# Altium PCB FMCWRadar.PcbDoc (part 3 of 5)
Units mil, origin at the board's own origin, x right, y up, seen from the top; angles counter-clockwise.
Board outline 4763.78 x 3464.57 mil, 6 copper layers (L1, L2(GND), L3, L4, L5(GND), L6), stack 32.112 mil thick; 306 components, 195 nets, 1057 pads, 1126 vias.
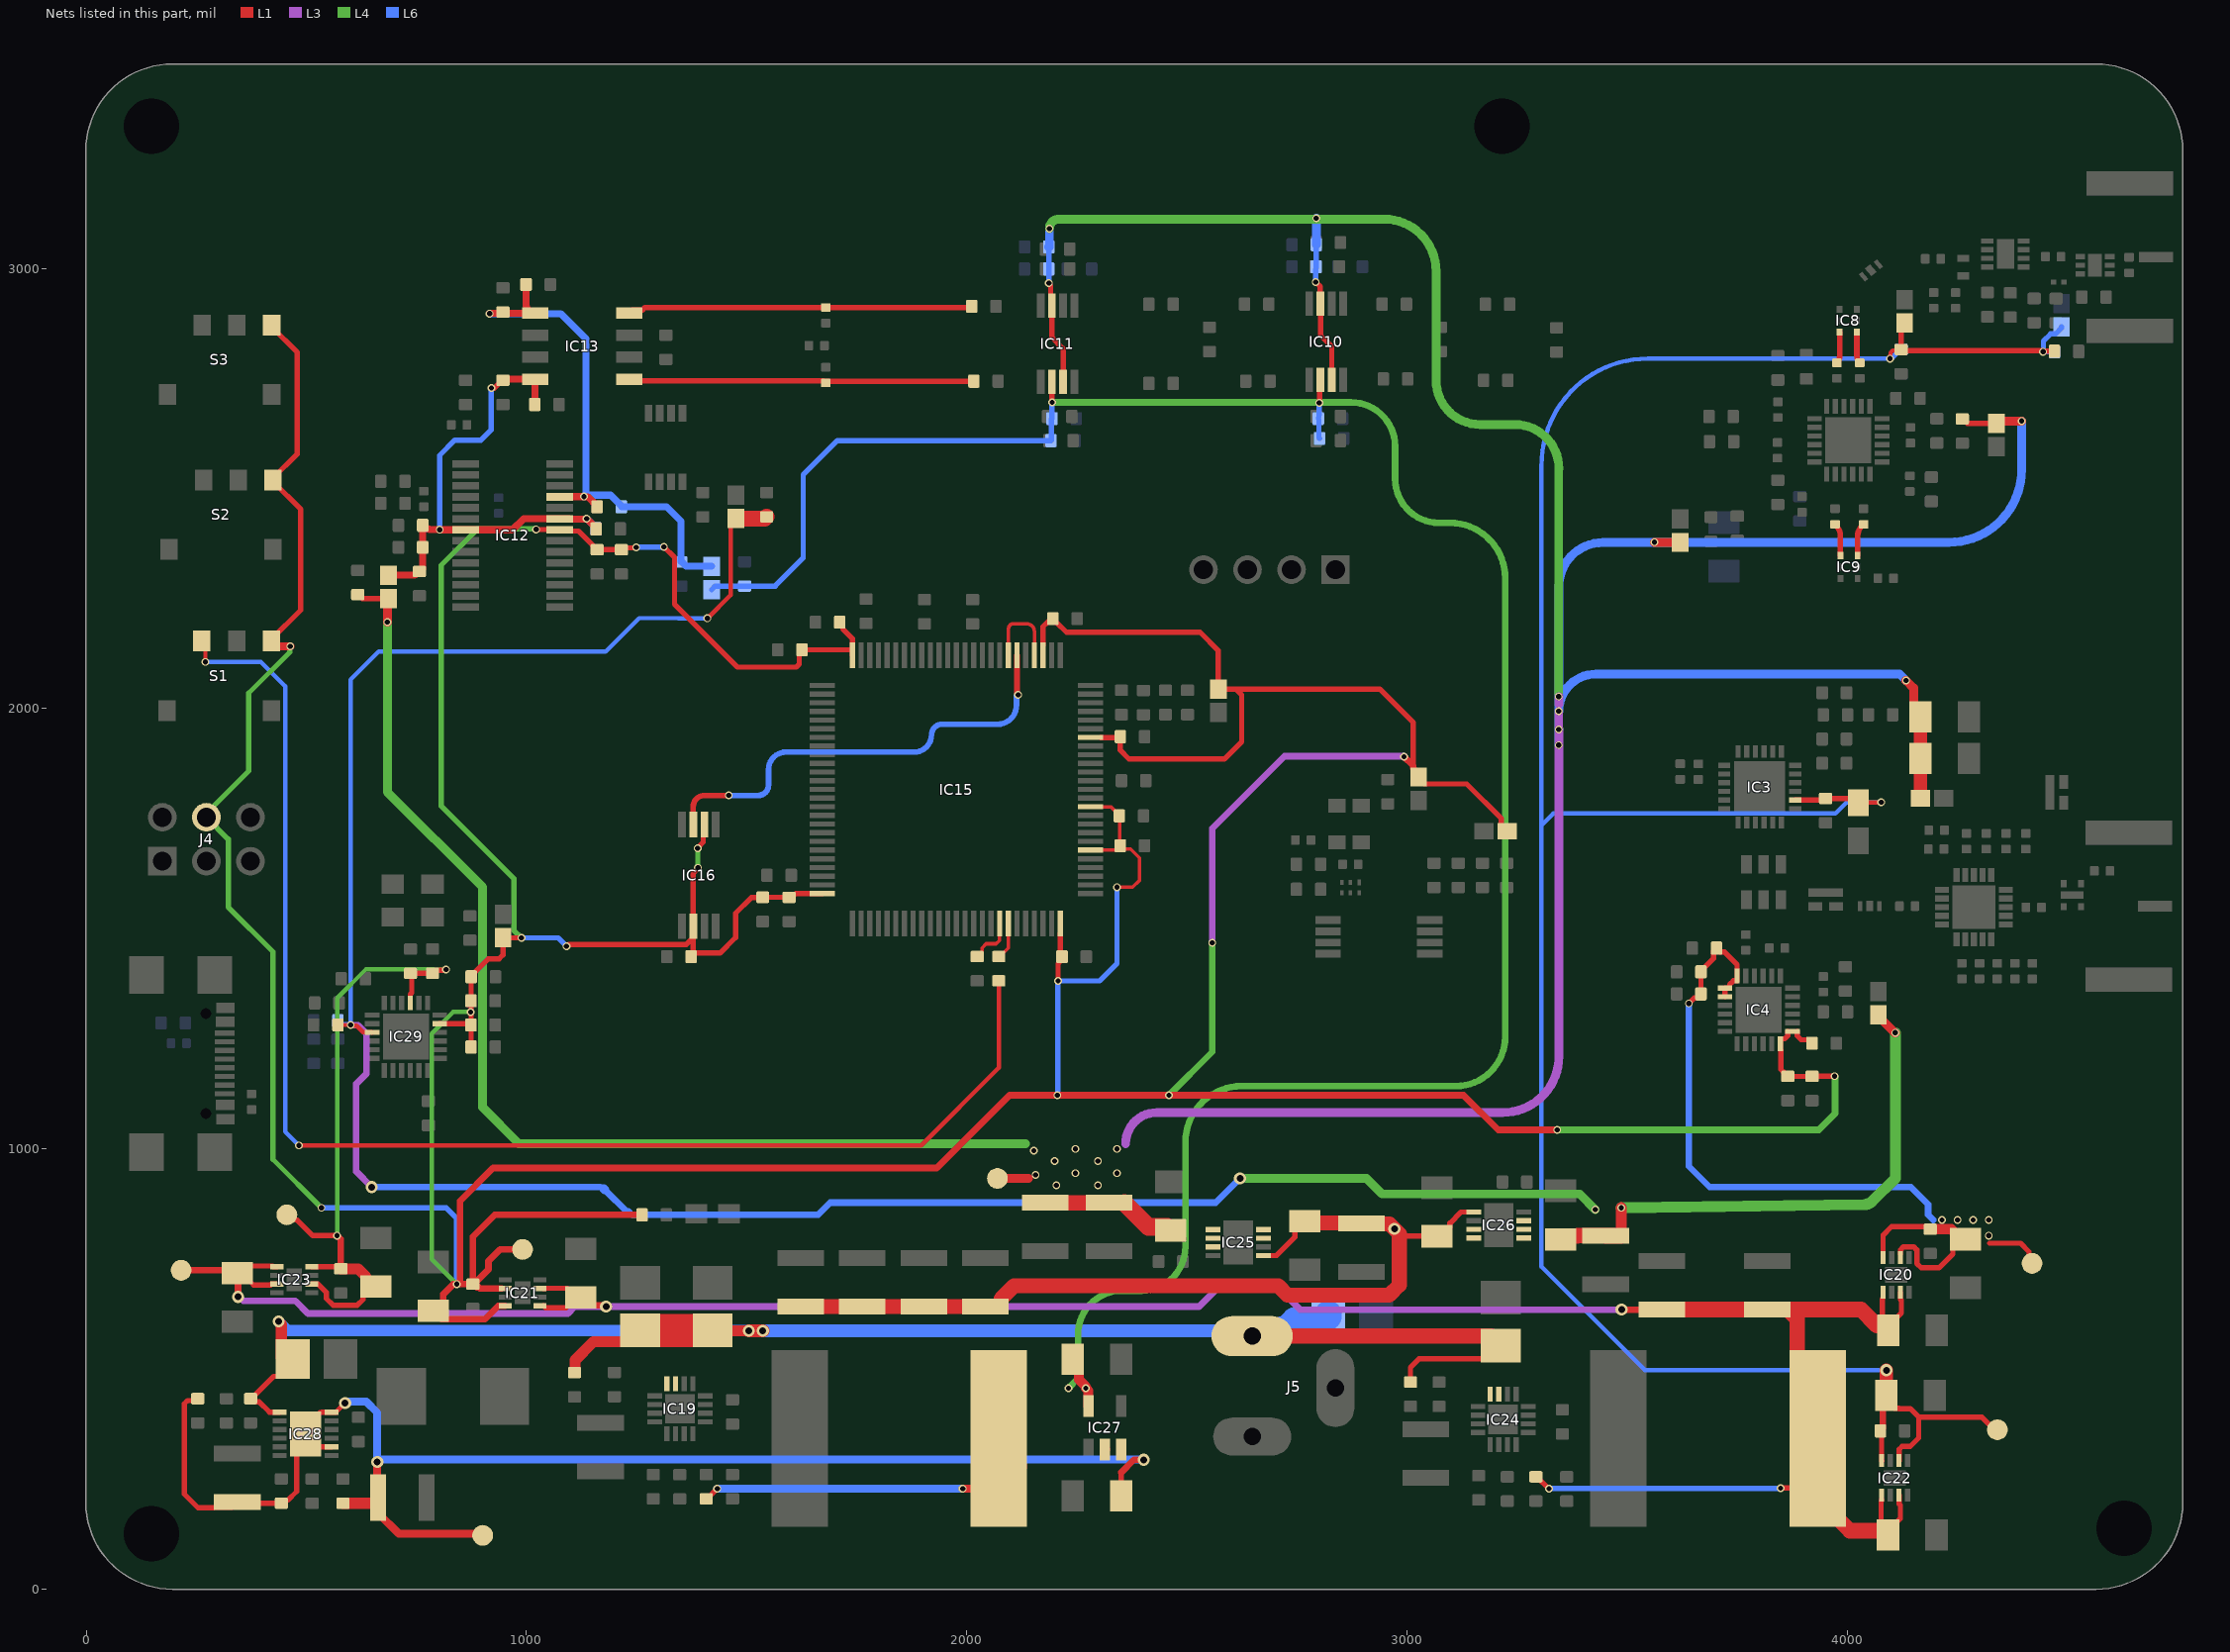
[diagram p6: the nets of this part, all layers, seen from the top]

## Via types
v1: diameter 17.72, hole 11.81, L1 to L6, tented both sides, 692 vias
v2: diameter 15.75, hole 11.81, L1 to L6, tented both sides, 386 vias
v3: diameter 27.56, hole 15.75, L1 to L6, tented both sides, 44 vias
v4: diameter 27.56, hole 11.81, L1 to L6, tented both sides, 3 vias
v5: diameter 23.62, hole 13.78, L1 to L6, tented both sides, 1 vias

## Nets (pads, with @x,y where several pads share a name; then routed paths per layer and width w, separated by ;. In a path a pad name is that pad's centre, name@x,y a point inside that pad or via, vN(x,y) a via of type N, cw(c..) or ccw(c..) an arc to the next point about the centre after c; other vN are vias at no path point) (continued)
+5V8: (continued)
  L1 w12: R42.2@1408.29,204.59 1410.25,204.59 v1(1433.48,227.82) ; L3.2@2015.31,227.82 2073.29,285.8 2073.29,302.98 L3.2@2073.29,342.15 ; IC25.5@2674.24,757.35 2703.91,757.35 2745.6,799.03 2745.6,823.03 C154.2@2748.04,825.47 ; 2979.62,802.02 3073.39,802.02 C161.2@3074.1,801.32 ; C161.2@3078.14,801.32 3097.73,820.91 3097.73,830.75 3123.32,856.34 IC26.5@3151.76,856.34
  L1 w18: v1(1991.16,227.82) L3.2@2015.31,227.82
  L1 w25: C132.2@1762.82,637.63 C132.2@1762.82,641.21 ; L3.2@2073.29,342.15 L3.2@2119,387.86
  L1 w34: C129.2@1622.82,641.21 C132.2@1762.82,641.21 C130.2@1902.82,641.21 2077.82,641.21 2078.82,642.21 2078.82,659.51 2107.76,688.45 2707.92,688.45 2728.9,667.47 2960.04,667.47 2983.04,690.47 2983.04,806.47 v3(2971.74,817.77) 2960.45,829.06 2897.68,829.06 C153.2@2896.68,830.06 2895.68,831.06 2779.68,831.06 C154.2@2775.04,835.71
  L1 w80: L3.2@2073.29,302.98 L3.2@2097.27,279
  L6 w18: v1(1433.48,227.82) v1(1991.16,227.82)
+5VA: C2.2 C3.2 C72.1 C73.1 C74.2 C75.2 C97.2 C155.2 C156.2 C157.2 FB1.1 FB5.1 FB6.2 FB8.1 IC10.3 IC10.7 IC11.3 IC11.7 IC25.1 IC25.2 IC25.3 pad.18 R14.2 | length 10733.6
  L1 w12: C97.2@616.76,2258.53 618.72,2258.53 627.77,2249.47 FB8.1@686.76,2249.47 ; v1(2186.76,2966.47) 2186.76,2964.93 2190.98,2960.7 2190.98,2918 IC11.3@2193.84,2915.14 2193.84,2842.75 2219.43,2817.16 IC11.7@2219.43,2741.91 ; C155.2@2463.61,814.43 C155.2@2465.57,816.4 ; C155.2@2491.16,796.72 C155.2@2493.04,794.84 ; v1(2793.04,2968.47) 2803.28,2958.23 2803.28,2921.24 IC10.3@2804.11,2920.41 ; IC10.3@2803.84,2920.14 2803.84,2847.75 2829.43,2822.16 IC10.7@2829.43,2746.91 ; R14.2@4262.04,2657.59 4264,2657.59 4273.56,2648.04 FB5.1@4339.32,2648.04
  L1 w20: v1(684.08,2196.32) 684.08,2246.79 FB8.1@686.76,2249.47 ; pad.18@2069.9,932.54 2140.77,932.54 ; v1(3562.36,2377.76) 3562.7,2377.43 FB6.2@3621.09,2377.43 ; v1(4134.06,2063.67) 4151.21,2046.52 4151.21,1996.27 C2.2@4166.36,1981.12 ; FB5.1@4339.32,2648.04 cw(c4344.3,2648.04) 4344.3,2653.02 v1(4396.68,2653.02)
  L1 w30: FB1.1@4166.76,1796.09 C3.2@4166.76,1886.09 C2.2@4166.76,1981.09
  L1 w35: C157.2@2178.29,877.15 C156.2@2323.29,877.15 C156.2@2358.29,877.15 ; C155.2@2455.51,822.52 C155.2@2463.61,814.43
  L1 w40: C156.2@2358.29,877.15 2412.92,822.52 C155.2@2455.51,822.52
  L3 w20: 2361.24,1011.28 cw(c2432.11,1011.28) 2432.11,1082.15 3217.94,1082.15 ccw(c3217.94,1209.71) 3345.5,1209.71 3345.5,1916.17 v1(3344.87,1916.8) ; v1(3344.87,1952.31) 3345.5,1951.68 v1@3345.5,1916.8 ; v1(3344.87,1993.96) 3344.87,1953.51 v1@3345.5,1952.88 ; v1(3344.87,2027.03) 3345.5,2026.4 3345.5,2010.5
  L4 w20: v1(684.08,2196.32) 684.08,1810.5 900.61,1593.96 900.61,1093.96 983.29,1011.28 2133.5,1011.28 ; v1(2188.01,3090.02) cw(c2209.83,3090.02) 2209.83,3111.84 2948.09,3111.84 cw(c2948.09,2993.4) 3066.53,2993.4 3066.53,2780.43 3066.53,2780.34 3066.53,2745.14 ccw(c3166.53,2745.14) 3166.53,2645.14 3245.5,2645.14 cw(c3245.5,2545.14) 3345.5,2545.14 3344.87,2544.51 v1(3344.87,2027.03)
  L6 w12: C73.1@2186.64,3048.53 2186.76,3048.53 C74.2@2186.76,2998.53 v1(2186.76,2966.47) v1@2187.04,2966.47 ; v1(2793.04,2968.47) 2793.04,2994.57 C75.2@2794.2,3003.53 C72.1@2794.2,3053.53
  L6 w20: C73.1@2186.64,3048.53 ccw(c2186.64,3049.91) 2186.75,3048.53 ccw(c2186.64,3049.91) 2188.01,3049.91 v1(2188.01,3090.02) ; C72.1@2794.2,3053.53 2794.31,3053.53 v1(2794.31,3113.65) ; v1(3344.87,1916.8) v1(3344.87,1952.31) ; v1(3344.87,1993.96) 3344.87,1953.51 v1@3345.5,1952.88 ; v1(3344.87,2027.03) 3344.87,1994.59 3345.5,1993.96 cw(c3429.75,1993.96) 3429.75,2078.21 4119.52,2078.21 v1(4134.06,2063.67) ; v1@3345.5,2027.03 3345.5,2277.09 cw(c3445.5,2277.09) 3445.5,2377.09 v1@3562.03,2377.09 ; v1@3562.03,2377.43 4231.32,2377.43 ccw(c4231.32,2542.78) 4396.68,2542.78 v1(4396.68,2653.02)
  other v1: 2203.76,916.8 2298.25,916.8 2156.52,940.42 2247.07,944.35 2341.56,944.35 2199.83,971.91 2298.25,971.91 2152.58,995.54 2247.07,999.47 2341.56,999.47
+5VA_ADC: C80.2 C81.2 C82.2 C83.2 C86.2 C87.2 C98.2 FB8.2 IC12.7 IC12.23 IC13.8 | length 1205.4
  L1 w12: v1(920.3,2727.82) 926.97,2727.82 944.79,2745.65 C86.2@946.75,2745.65 cw(c949.2,2745.65) C86.2@949.2,2748.09 ; IC13.8@1019.04,2747.14 cw(c1019.98,2747.14) IC13.8@1019.98,2748.09
  L1 w16: FB8.2@686.76,2302.7 746.29,2302.7 754.79,2311.21 C98.2@756.76,2311.21 758.72,2311.21 763.72,2316.21 763.72,2318.17 764.31,2318.76 C80.2@764.31,2366.09 C82.2@764.31,2416.09 764.31,2414.13 769.31,2409.13 776.25,2409.13 778.92,2406.45 802.67,2406.45 803.13,2406 IC12.7@860.5,2406 ; IC12.7@862.02,2405.87 968.42,2405.87 993.38,2430.83 IC12.23@1075.56,2430.83 ; C86.2@949.2,2748.09 IC13.8@1019.98,2748.09 ; C87.2@1019.04,2690.47 IC13.8@1019.04,2747.14 ; IC12.23@1075.3,2431.09 1096.77,2431.09 1097.34,2430.52 1103.15,2430.52 1103.65,2430.02 1138.22,2430.02 1158.2,2410.05 C83.2@1158.2,2408.09
  L6 w12: v1(803,2406.13) 803,2575.09 837.62,2609.71 896.68,2609.71 920.3,2633.33 v1(920.3,2727.82)
  L6 w16: v1(1136.77,2431.47) 1158.2,2410.05 C81.2@1158.2,2408.09
+5VD: C90.2 C162.2 C163.2 C178.2 C179.2 FB2.2 FB7.2 IC26.1 IC26.2 IC26.3 IC29.3 | length 6641.3
  L1 w10: C179.2@571.87,1281.09 v1(600.75,1281.1) ; v1(600.75,1281.1) 602.22,1279.63 614.04,1279.63 628.6,1265.06 648.61,1265.06 IC29.3@649.51,1264.16 ; v1(1411.03,2204.87) 1463.61,2257.44 1463.61,2419.32 FB7.2@1475.76,2431.47
  L1 w20: FB2.2@4071.19,1304.07 4071.19,1301.16 4108.82,1263.54 v1(4109.65,1263.54)
  L1 w25: C163.2@3487.23,802.67 v1(3487.23,865.61)
  L1 w35.43: FB7.2@1475.76,2431.47 1541.7,2431.47 C90.2@1545.76,2435.53 ; C162.2@3349.59,794.02 3357.46,801.89 3386.97,801.89 3388.06,802.98 3463.57,802.98 C163.2@3463.61,803.02 ; C163.2@3451.79,802.39 C163.2@3486.79,802.39
  L3 w15: v1(600.75,1281.1) 601.63,1280.22 617.7,1280.22 636.83,1261.09 636.83,1171.15 613.21,1147.53 613.21,948.29 v3(648.64,912.86)
  L4 w20: v3(2621.09,932.54) 2908.49,932.54 2943.92,897.11 3392.74,897.11 v1(3428.17,861.68)
  L4 w25: v1(3487.23,865.61) 4040.14,873.35 ccw(c4039.72,898.34) 4057.4,880.67 4109.65,932.92 v1(4109.65,1263.54)
  L6 w10: C178.2@571.76,1291.09 571.76,1290.58 579.76,1282.58 599.27,1282.58 v1(600.75,1281.1) 600.75,2065.75 664.39,2129.39 1180.14,2129.39 1255.99,2205.24 1344.74,2205.24 1345.12,2204.87 v1(1411.03,2204.87)
  L6 w12: C178.2@571.76,1290.58 571.76,1289.13 C178.2@578.76,1282.13
  L6 w15: v3(648.64,912.86) 1163.98,912.86 cw(c1163.98,892.86) 1175.98,908.86 ; 1178.09,907.04 1229.44,855.69 ; 1231.54,853.87 ccw(c1243.54,869.87) 1243.54,849.87 1662.42,849.87 1689.98,877.43 2565.97,877.43 v3(2621.09,932.54)
  L6 w20: 1175.98,908.86 cw(c1163.98,892.86) 1178.09,907.04 ; 1229.44,855.69 ccw(c1243.54,869.87) 1231.54,853.87
+12V: C125.1 C126.1 C127.1 C147.1 C159.1 IC19.15 IC19.16 IC24.15 IC24.16 IC28.1 J5.1 R43.2 R48.2 R52.2 | length 4061.6
  L1 w12: IC28.1@439.24,401.36 416.46,401.36 392.55,425.27 382.25,425.27 381.34,426.18 381.34,436.48 R52.2@379.46,436.48 ; C159.1@469.16,522.15 469.16,515.26 461.7,507.81 436.77,482.87 425.86,482.87 R52.2@379.46,436.48 ; 1305.87,558.78 1305.87,571.15 ; 1319.24,584.51 1321.87,587.15 ; R48.2@3008.29,469.71 3008.29,503.33 3027.47,522.51 3182.78,522.51 C147.1@3213.29,553.02 ; R52.2@379.46,436.48 375.25,432.27 R52.2@373.29,432.27 377.5,436.48 R52.2@379.46,436.48
  L1 w25: v3(437.04,607.47) 437.04,606.78 443.27,600.55 443.27,526.24 C159.1@461.7,507.81 ; R43.2@1109.27,491.6 1110.01,491.6 1110.51,492.1 1110.51,519.46 1152.31,561.26 1232.4,561.26 C126.1@1258.29,587.15 ; C127.1@1423.29,587.15 1423.97,586.47 v3(1505.04,586.47) ; C147.1@3192.03,574.28 C147.1@3213.29,553.02
  L1 w30: v3(1505.04,586.47) v3(1537.04,586.47)
  L1 w35: J5.1@2648.64,574.28 C147.1@3192.03,574.28
  L1 w75: C126.1@1258.29,587.15 1321.87,587.15 C127.1@1423.29,587.15
  L6 w25: v3(437.04,607.47) 453.62,590.89 453.62,586.89 v3@1505.04,586.89 ; J5.1@2636.45,586.47 J5.1@2648.64,574.28
  L6 w30: v3(1537.04,586.47) 2609.6,586.47 J5.1@2636.45,586.47
  L6 w60: J5.1@2648.64,574.28 2704.16,574.28 2719.43,589.55 2725.67,589.55 2746.31,610.2 2813.38,610.2 2821.77,618.58 C125.1@2821.77,625.47
-5V8: C160.2 C164.2 C168.2 C169.1 IC27.2 IC27.3 IC28.8 IC28.12 IC28.13 pad.13 R53.2 R55.1 | length 3355.8
  L1 w11.81: C168.2@253.29,432.27 248.77,427.75 230.32,427.75 223.01,420.45 223.01,215.5 254.04,184.47 289.28,184.47 289.86,185.06 331.2,185.06 C169.1@343.29,197.15 ; C169.1@345.85,194.59 R55.1@443.29,194.59 450.39,201.69 458.31,201.69 478.04,221.41 IC28.13@478.04,331.9
  L1 w12: IC28.13@498.29,352.06 527.72,322.62 IC28.8@557.35,322.62 ; IC28.13@498.29,352.15 498.29,367.9 531.29,400.89 534.63,400.89 535.1,401.36 IC28.12@557.35,401.36 567,401.36 v3(588.07,422.44) ; 2351.36,264.8 C164.2@2351.36,211.91 C164.2@2353.37,209.91
  L1 w15: 2351.36,264.8 2380.04,293.47 v3(2402.04,293.47)
  L1 w18: C160.2@661.33,209.11 v3(661.33,288.41) ; C160.2@663.29,207.15 663.29,172.15 709.98,125.46 896.68,125.46 pad.13@900.61,121.52
  L1 w23: IC27.2@2313.96,316.91 IC27.2@2314,316.87
  L1 w25: IC28.13@482.04,335.9 IC28.13@498.29,352.15 ; R53.2@583.29,194.59 C160.2@656.79,194.59
  L6 w18: v3(588.07,422.44) 590.04,420.47 594.98,425.41 636.09,425.41 661.33,400.18 v3(661.33,288.41) 663.91,288.41 669.75,294.25 v3@2393.06,294.25 ; v3@2399.06,290.5 v3(2402.04,293.47)
-5VA: C76.1 C77.1 C78.2 C79.2 C99.2 C165.2 FB9.1 IC10.6 IC11.6 IC27.5 | length 5330.9
  L1 w12: IC11.6@2193.84,2741.91 2193.96,2741.8 2193.96,2695.55 v1(2194.08,2695.43) ; v1(2801.04,2694.47) 2802.13,2695.57 2802.13,2745.2 IC10.6@2803.84,2746.91
  L1 w23: C165.2@2241.12,521.91 2255.22,507.82 2255.22,474.98 2270.69,459.51 v1(2270.69,456.17) 2276.25,450.61 2276.25,428.45 2276.56,428.13 IC27.5@2276.56,415.34
  L4 w15: v1(2194.08,2695.43) v1@2800.08,2695.43 ; v1(2231.32,456.17) 2252.98,477.82 2252.98,577.6 cw(c2352.98,577.6) 2352.98,677.6 2397.07,677.6 ccw(c2397.07,777.6) 2497.07,777.6 2497.07,1014.61 cw(c2624.63,1014.61) 2624.63,1142.17 3111.27,1142.17 ccw(c3111.27,1254.34) 3223.45,1254.34 3223.45,2296.11 ccw(c3097.86,2296.11) 3097.86,2421.69 3073.45,2421.69 cw(c3073.45,2521.69) 2973.45,2521.69 2973.45,2595.43 ccw(c2873.45,2595.43) 2873.45,2695.43 v1@2802,2695.43
  L6 w12: FB9.1@1420.76,2269.85 1428.99,2278.09 C99.2@1495.76,2278.09 1565.05,2278.09 1628.96,2341.99 1628.96,2530.97 1706.52,2608.53 C76.1@2191.52,2608.53 2192.8,2609.81 2192.8,2657.25 C78.2@2194.08,2658.53 v1(2194.08,2695.43) ; v1(2801.04,2694.47) 2800.53,2667.49 C79.2@2799.08,2658.53 2800.36,2657.25 2800.36,2614.81 C77.1@2801.64,2613.53
-5VA_ADC: C91.2 C92.2 C95.2 C96.2 C100.2 FB9.2 IC12.25 IC13.5 | length 1291.1
  L1 w16: v1(916.36,2897.11) 916.69,2897.44 948.55,2897.44 949.2,2898.09 IC13.5@1019.98,2898.09 cw(c1019.98,2918.87) 999.2,2918.87 C91.2@999.2,2963.09 ; IC12.25@1075.3,2481.09 1075.49,2481.28 1130.85,2481.28 v1(1131.04,2481.47) 1131.37,2481.14 1139.66,2481.14 1160.76,2460.05 C95.2@1160.76,2458.09
  L6 w16: v1(916.36,2897.11) 1077.78,2897.11 1135.05,2839.84 1135.05,2485.95 1131.04,2481.94 v1(1131.04,2481.47) 1131.5,2481.47 1134.58,2484.55 1191.37,2484.55 1215.87,2460.05 C96.2@1215.87,2458.09 1318.42,2458.09 1350.76,2425.76 C100.2@1350.76,2333.09 ; C100.2@1352.72,2333.09 1362.72,2323.09 FB9.2@1420.76,2323.09
ADC_DCMI_CLK: IC15.31 IC16.3 | length 1039.6
  L1 w10: IC15.31@2113.64,2121.64 IC15.31@2114.55,2120.73
  L1 w12.69: IC16.3@1378.96,1736.76 1378.96,1777.03 cw(c1404.55,1777.03) 1404.55,1802.62 v1(1459.67,1802.62) ; IC15.31@2114.55,2120.73 2114.55,2033.57 ccw(c2117.15,2033.57) v1(2117.15,2030.97)
  L6 w12.69: v1(1459.67,1802.62) 1526.6,1802.62 ccw(c1526.6,1826.24) 1550.22,1826.24 1550.22,1861.68 cw(c1589.59,1861.68) 1589.59,1901.05 1880.93,1901.05 ccw(c1880.93,1940.42) 1920.3,1940.42 cw(c1943.92,1940.42) 1943.92,1964.04 2069.9,1964.04 ccw(c2069.9,2007.35) 2113.21,2007.35 2113.21,2027.03 cw(c2117.15,2027.03) v1(2117.15,2030.97)
ADC_DCMI_HSYNC: IC15.29 IC15.32 | length 190.2
  L1 w8: IC15.32@2094.87,2120.73 2094.87,2180.23 cw(c2104.87,2180.18) 2095.44,2183.51 ccw(c2075.9,2190.51) 2095.55,2183.83 ccw(c2075.9,2190.51) 2095.92,2185.06 cw(c2105.56,2182.39) 2102.71,2191.97 2104.11,2192.39 2136.83,2192.39 cw(c2136.83,2175.3) 2153.92,2175.3 IC15.29@2153.92,2120.73
ADC_DCMI_VSYNC: IC15.93 R36.2 | length 110.2
  L1 w8: R36.2@2024.04,1436.47 2026,1436.47 2035,1445.47 2035,1455.98 2044.49,1465.47 2067.04,1465.47 2074.65,1473.08 2074.65,1509.97 IC15.93@2075.65,1510.97
ADC_IF_N: C64.1 IC13.1 R31.1 | length 786.5
  L1 w12: IC13.1@1233.53,2748.09 1237.43,2744.19 1674.6,2744.19 1679.16,2739.63 R31.1@1680.14,2739.63 ; R31.1@1680.14,2743.53 C64.1@2016.52,2743.53
ADC_IF_P: C67.1 IC13.4 R28.1 | length 784.4
  L1 w12: IC13.4@1233.53,2898.09 1240.32,2904.88 1263.26,2904.88 1269.27,2910.89 2008.88,2910.89 C67.1@2011.52,2913.53
BALUN_LO_N: C61.1 IC9.3 | length 75.2
  L1 w12.69: IC9.3@4024.04,2347.47 4024.04,2391.8 cw(c4055.08,2391.8) 4033.13,2413.75 C61.1@4037.76,2418.37
BALUN_LO_P: C59.1 IC9.4 | length 75.5
  L1 w12.69: C59.1@3973.74,2418.37 C59.1@3972.76,2418.37 3974.69,2416.43 cw(c3949.67,2391.4) 3985.06,2391.4 IC9.4@3985.06,2347.47
BALUN_RF_N: C53.1 IC8.4 | length 71.7
  L1 w12.69: IC8.4@4022.24,2855.1 4022.24,2801.59 ccw(c4045.44,2801.59) C53.1@4029.04,2785.19
BALUN_RF_P: C54.1 IC8.3 | length 71.6
  L1 w12.69: C54.1@3977.04,2785.19 ccw(c3962,2800.23) 3983.27,2800.23 IC8.3@3983.27,2855.1
BOOT0: R35.1 S1.C1 | length 3171.2
  L1 w10: S1.C1@262.82,2153.02 270.69,2145.14 v1(270.69,2105.77) ; v1(483.29,1007.35) 1896.68,1007.35 2073.04,1183.71 R35.1@2073.04,1381.35
  L6 w10: v1(270.69,2105.77) 396.68,2105.77 451.79,2050.65 451.79,1038.84 v1(483.29,1007.35)
BOOT0_MCU: IC15.94 R35.2 | length 85.2
  L1 w8: R35.2@2073.04,1436.47 2075,1436.47 2094.87,1456.34 IC15.94@2094.87,1511.44